# Altium PCB UZ_A_DSUB_Breakout.PcbDoc
Units mm, origin at the board's own origin, x right, y up, seen from the top; angles counter-clockwise.
Board outline 156 x 100 mm, 2 copper layers (Top Layer, Bottom Layer), stack 1.535 mm thick; 7 components, 47 nets, 132 pads, 39 vias.
Unrouted connection lines stored in the file: 1.
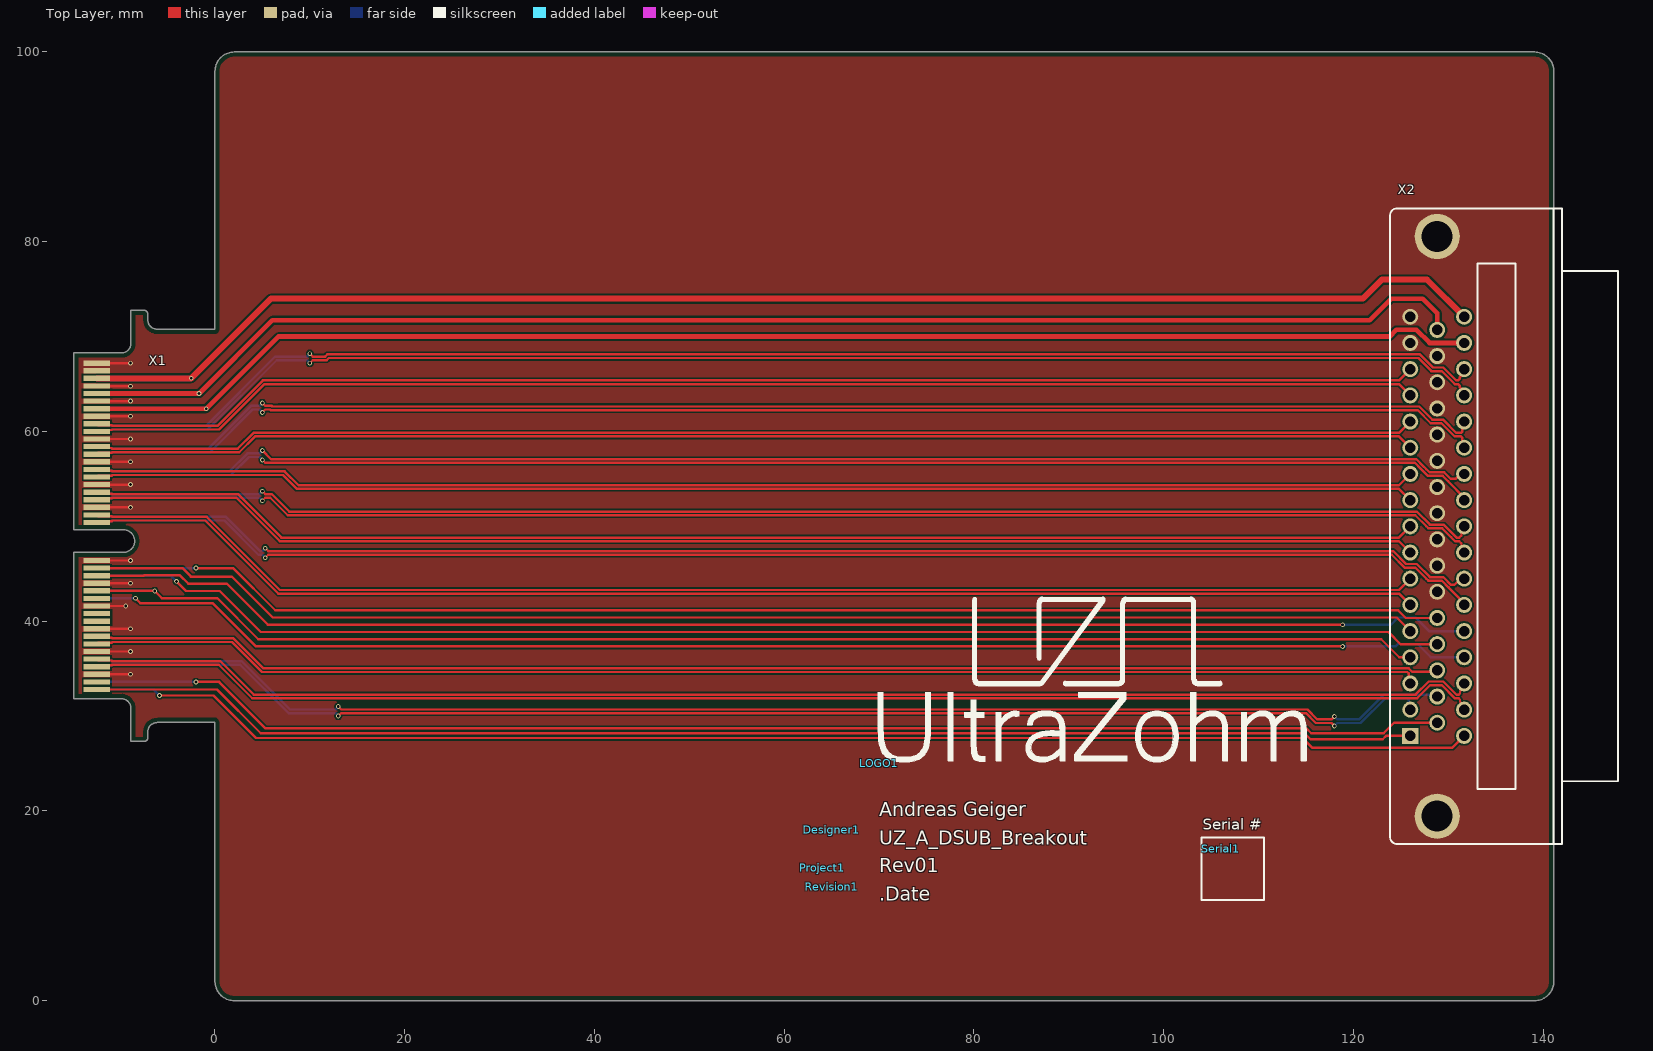
[diagram p0: Top Layer view]
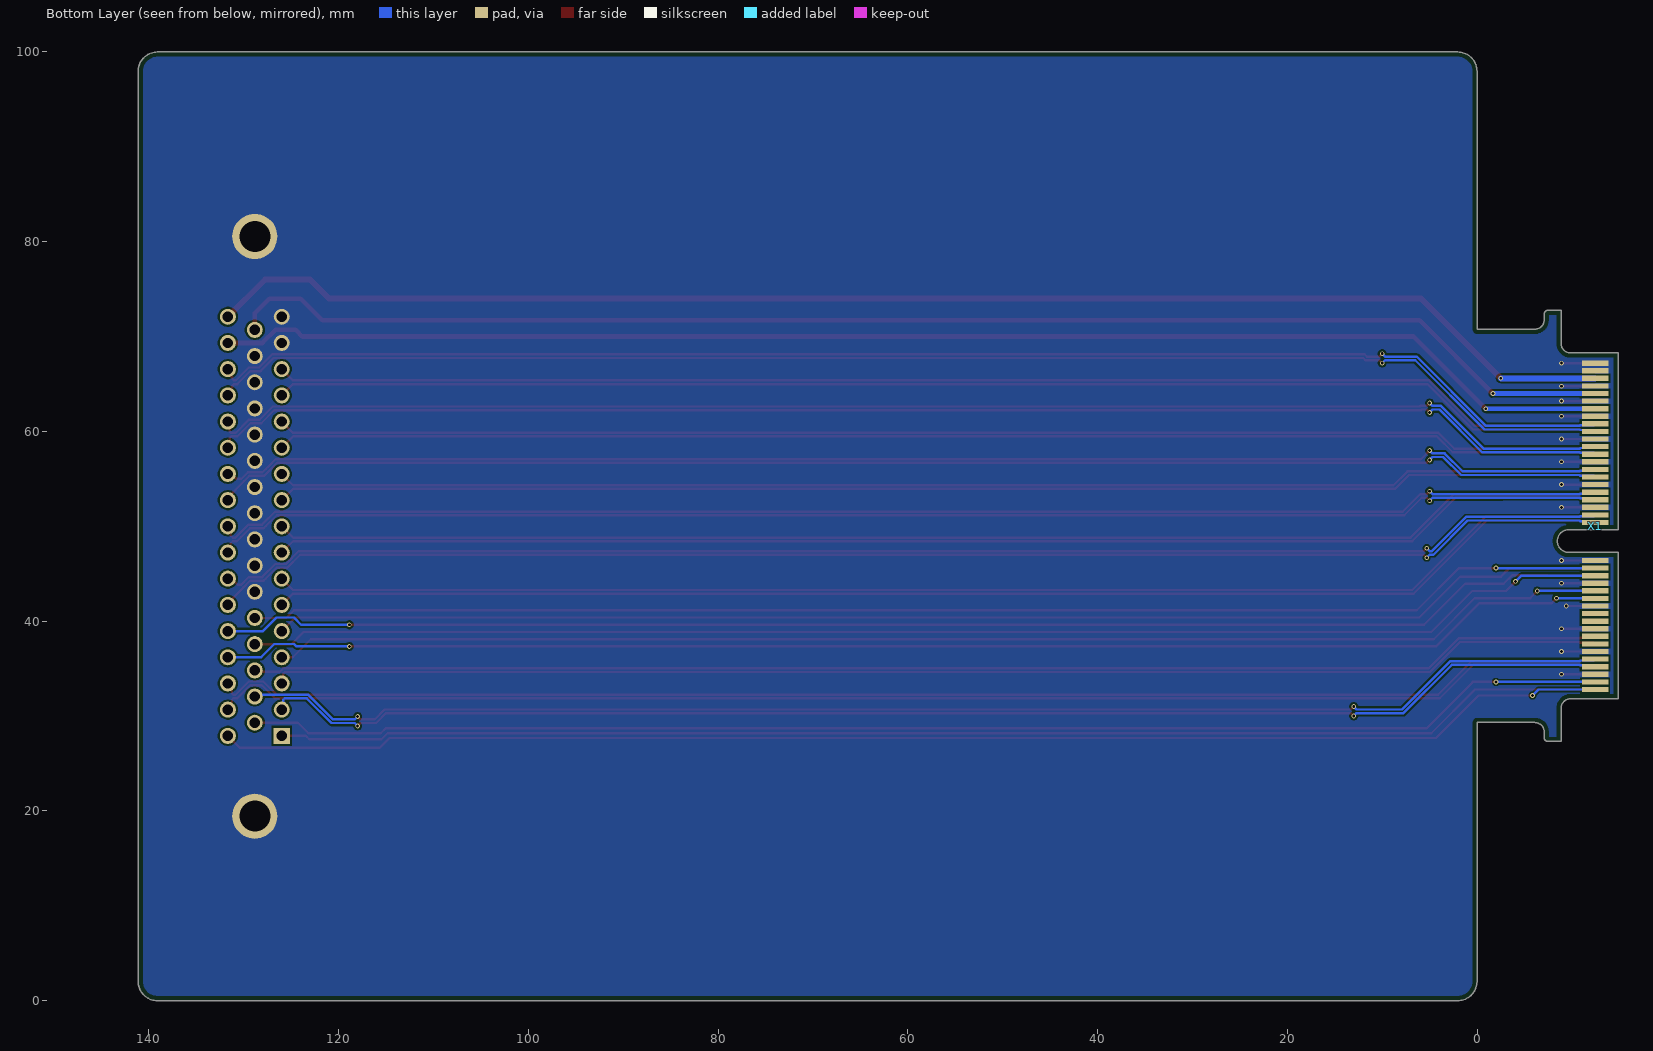
[diagram p1: Bottom Layer view, seen from below]

## Layer stack, top to bottom
Top Mask: solder mask 0.015, Solder Resist, Dk 3.8
Top Layer: signal copper 0.035
Dielectric 1: prepreg 0.2, 7628, Dk 4.6
Core: core 1.065, FR-4, Dk 4.5
Dielectric 2: prepreg 0.2, 7628, Dk 4.6
Bottom Layer: signal copper 0.035
Bottom Mask: solder mask 0.015, Solder Resist, Dk 3.8

## Board outline
-14.859,31.821 -9.859,31.821 cw(c-9.859,30.821) -8.859,30.821 -8.859,27.321 -7.479,27.321 ccw(c-7.479,27.721) -7.079,27.721 -7.079,28.321 cw(c-6.079,28.321) -6.079,29.321 0,29.321 0,2.007 ccw(c2.032,2.032) 2.057,0 139.1,0 ccw(c139.1,2.04) 141.14,2.04 141.14,97.96 ccw(c139.1,97.96) 139.1,100 2.032,100 ccw(c2.032,97.968) 0,97.968 0,70.771 -6.079,70.771 cw(c-6.079,71.771) -7.079,71.771 -7.079,72.371 ccw(c-7.479,72.371) -7.479,72.771 -8.859,72.771 -8.859,69.271 cw(c-9.859,69.271) -9.859,68.271 -14.859,68.271 -14.859,49.646 -9.659,49.646 cw(c-9.659,48.446) -9.659,47.246 -14.859,47.246

## Design rules (kind name [scope] priority, off if disabled: settings)
BoardOutlineClearance BoardOutlineClearance_TopOverlay [OnLayer('Top Overlay') or OnLayer('Bottom Overlay')] p1: gap=0 ignorepadtopadclearanceinfootprint=FALSE
BoardOutlineClearance [All] p2: gap=0.508 ignorepadtopadclearanceinfootprint=FALSE except(0: Arc-SplitContinuation Track-SplitContinuation SMDPad-SplitContinuation THPad-SplitContinuation Via-SplitContinuation Fill-SplitContinuation Poly-SplitContinuation Region-SplitContinuation Text-OutlineEdge Text-CavityEdge Text-CutoutEdge Text-SplitBarrior Text-SplitContinuation; 0.254: SMDPad-OutlineEdge SMDPad-CavityEdge SMDPad-CutoutEdge SMDPad-SplitBarrior)
Clearance [All] p1: gap=0.2 ignorepadtopadclearanceinfootprint=FALSE except(0: Arc-Text Track-Text SMDPad-Text THPad-Text Via-Text Fill-Text Poly-Text Region-Text Text-Text Text-Hole; 0.127: Arc-Arc Arc-Track Track-Track SMDPad-SMDPad; 0.254: Arc-Via Track-Via; 0.5: THPad-THPad Via-Via)
ComponentClearance [All] p1: gap=0 collisioncheckmode=3 verticalgap=0 showdistances=FALSE
DiffPairsRouting [All] p1: maxlimit=0.127 minlimit=0.127 mostfreqgap=0.127 toplayer_minwidth=0.254 toplayer_maxwidth=0.254 toplayer_prefwidth=0.254 bottomlayer_minwidth=0.254 bottomlayer_maxwidth=0.254 bottomlayer_prefwidth=0.254 impedanceprofiledriven=TRUE impedanceprofileid={1E899714-F215-421E-BD83-15DB56C979E2} impedanceprofilevalue=100.000000 maxuncoupledlength=12.7
HoleSize [All] p1: absolutevalues=TRUE maxlimit=6.3 minlimit=0.2 maxpercent=80.000 minpercent=20.000
MatchedLengths [All] p1: tolerance=0.254 checknetsindiffpair=TRUE checkdiffpairvsdiffpair=FALSE checkxsignals=FALSE checkothers=FALSE
MinimumSolderMaskSliver [All] p1: minsoldermaskwidth=0.089
PlaneConnect [All] p1: pad.planeconnectstyle=Relief pad.reliefexpansion=0.508 pad.reliefentries=4 pad.reliefconductorwidth=0.254 pad.reliefairgap=0.254 via.planeconnectstyle=Direct via.reliefexpansion=0.508 via.reliefentries=4 via.reliefconductorwidth=0.254 via.reliefairgap=0.254
PolygonConnect PolygonConnect_GND [InNet('GND')] p1 off: thpad.connectstyle=Relief thpad.reliefconductorwidth=0.254 thpad.reliefentries=4 thpad.polygonreliefangle="90 Angle" thpad.airgapwidth=0.254 smdpad.connectstyle=Relief smdpad.reliefconductorwidth=0.254 smdpad.reliefentries=4 smdpad.polygonreliefangle="90 Angle" smdpad.airgapwidth=0.254 via.connectstyle=Direct via.reliefconductorwidth=0.254 via.reliefentries=4 via.polygonreliefangle="90 Angle" via.airgapwidth=0.254
PolygonConnect [All] p2: connectstyle=Direct reliefconductorwidth=0.254 reliefentries=4 polygonreliefangle="90 Angle" airgapwidth=0.127
RoomDefinition Component_UpperEdgeKeepOut [All] p1: confinementstyle=ConfineOut formatcopy=TRUE lockcomponents=FALSE outline 0,97 142,97 142,100 0,100
RoomDefinition Component_LowerEdgeKeepOut [All] p2: confinementstyle=ConfineOut formatcopy=TRUE lockcomponents=FALSE outline 0,0 142,0 142,3 0,3
RoutingVias [All] p1: holewidth=0.3 width=0.6 viastyle="Through Hole" minholewidth=0.2 minwidth=0.4 maxholewidth=0.8 maxwidth=1.6
SilkToSilkClearance [All] p1: silktosilkclearance=0
SilkToSolderMaskClearance [IsPad] p1: minsilkscreentomaskgap=0 clearancetoexposedcopper=TRUE
SolderMaskExpansion [All] p1: expansion=0.102 istentingtop=FALSE
Width width_s75 [InNetClass('S75')] p1 off: maxlimit=0.1 minlimit=0.1 preferedwidth=0.1 minimp=50.000000 maximp=50.000000 favimp=50.000000
Width [All] p2: maxlimit=10 minlimit=0.2 preferedwidth=0.254 minimp=50.000000 maximp=50.000000 favimp=50.000000
23 further rules are at their usual default settings.

## Classes and differential pairs
net class S75: ANL_SPI_CLK ANL_SPI_CS ANL_SPI_MOSI
net class HS: GTH_CLK_N GTH_CLK_P GTH_RX0_N GTH_RX0_P GTH_TX0_N GTH_TX0_P
component class TopSheet: Designer1 LOGO1 Project1 Revision1 Serial1
component class U_CarrierConnector: X1
component class U_AnalogConnector: X2
differential pair GTH_TX0: +GTH_TX0_P -GTH_TX0_N
differential pair GTH_RX0: +GTH_RX0_P -GTH_RX0_N
differential pair GTH_CLK: +GTH_CLK_P -GTH_CLK_N
differential pair ANL_09: +ANL_09_P -ANL_09_N
differential pair ANL_08: +ANL_08_P -ANL_08_N
differential pair ANL_07: +ANL_07_P -ANL_07_N
differential pair ANL_06: +ANL_06_P -ANL_06_N
differential pair ANL_05: +ANL_05_P -ANL_05_N
differential pair ANL_04: +ANL_04_P -ANL_04_N
differential pair ANL_03: +ANL_03_P -ANL_03_N
differential pair ANL_02: +ANL_02_P -ANL_02_N
differential pair ANL_01: +ANL_01_P -ANL_01_N
differential pair ANL_00: +ANL_00_P -ANL_00_N

## Components (designator, comment, footprint, x,y, rotation, side; value= is the part's Value field where it differs from the comment)
Designer1 "Andreas Geiger" Designator:comment 65,18 r0 top
LOGO1 "UZ Logo" UZ_Logo_medium 70,25 r0 top
Project1 "UZ_A_DSUB_Breakout" COMMENT 64,14 r0 top
Revision1 "Rev01" Designator:comment 65,12 r0 top
Serial1 "Serial #" SERIAL 106,16 r0 top
X1 "HSEC8-140-01-XX-DV-A-BL-CARD" HSEC8-140-01-XX-DV-A-BL-CARD -14.846,50 r270 bottom
X2 "163A18339X" dsub50_male_163A18339X 126,27.912 r90 top locked

## Footprints (in the part's own frame and the unit in brackets; to place one, negate y for a bottom-side part, rotate by r counter-clockwise, add the part's x,y. Pads: shape width x height; smd on the part's side, far side on the other; paste and mask are expansions set on the pad)
COMMENT [mm] "prints out the comment of a component"
Designator:comment [mm] "prints out designator and comment of a component"
dsub50_male_163A18339X [mm]
  rect 1.69x1.69 hole 1.09: 1(0,0)
  round 1.69 hole 1.09: 2(2.761,0) 3(5.522,0) 4(8.283,0) 5(11.044,0) 6(13.805,0) 7(16.566,0) 8(19.327,0) 9(22.088,0) 10(24.849,0) 11(27.61,0) 12(30.371,0) 13(33.132,0) 14(35.893,0) 15(38.654,0) 16(41.415,0) 17(44.176,0) 18(1.381,-2.84) 19(4.142,-2.84) 20(6.903,-2.84) 21(9.664,-2.84) 22(12.425,-2.84) 23(15.186,-2.84) 24(17.946,-2.84) 25(20.707,-2.84) 26(23.469,-2.84) 27(26.23,-2.84) 28(28.991,-2.84) 29(31.752,-2.84) 30(34.512,-2.84) 31(37.273,-2.84) 32(40.034,-2.84) 33(42.795,-2.84) 34(0,-5.68) 35(2.761,-5.68) 36(5.522,-5.68) 37(8.283,-5.68) 38(11.044,-5.68) 39(13.805,-5.68) 40(16.566,-5.68) 41(19.327,-5.68) 42(22.088,-5.68) 43(24.849,-5.68) 44(27.61,-5.68) 45(30.371,-5.68) 46(33.132,-5.68) 47(35.893,-5.68) 48(38.654,-5.68) 49(41.415,-5.68) 50(44.176,-5.68)
  round 4.76 hole 3.26: 51(-8.467,-2.84) 52(52.643,-2.84)
  silkscreen extent -11.4,-21.9 55.6,2.12, body extent -11.42,-21.99 55.58,2.11, height 16.34
HSEC8-140-01-XX-DV-A-BL-CARD [mm]
  rect 0.55x2.8 smd far side mask+0.05: 1(-17.2,-2.4) 3(-16.4,-2.4) 5(-15.6,-2.4) 7(-14.8,-2.4) 9(-14,-2.4) 11(-13.2,-2.4) 13(-12.4,-2.4) 15(-11.6,-2.4) 17(-10.8,-2.4) 19(-10,-2.4) 21(-9.2,-2.4) 23(-8.4,-2.4) 25(-7.6,-2.4) 27(-6.8,-2.4) 29(-6,-2.4) 31(-5.2,-2.4) 33(-4.4,-2.4) 35(-3.6,-2.4) 37(-2.8,-2.4) 39(-2,-2.4) 41(-1.2,-2.4) 43(-0.4,-2.4) 45(3.6,-2.4) 47(4.4,-2.4) 49(5.2,-2.4) 51(6,-2.4) 53(6.8,-2.4) 55(7.6,-2.4) 57(8.4,-2.4) 59(9.2,-2.4) 61(10,-2.4) 63(10.8,-2.4) 65(11.6,-2.4) 67(12.4,-2.4) 69(13.2,-2.4) 71(14,-2.4) 73(14.8,-2.4) 75(15.6,-2.4) 77(16.4,-2.4) 79(17.2,-2.4)
  rect 0.55x2.8 smd mask+0.05: 2(-17.2,-2.4) 4(-16.4,-2.4) 6(-15.6,-2.4) 8(-14.8,-2.4) 10(-14,-2.4) 12(-13.2,-2.4) 14(-12.4,-2.4) 16(-11.6,-2.4) 18(-10.8,-2.4) 20(-10,-2.4) 22(-9.2,-2.4) 24(-8.4,-2.4) 26(-7.6,-2.4) 28(-6.8,-2.4) 30(-6,-2.4) 32(-5.2,-2.4) 34(-4.4,-2.4) 36(-3.6,-2.4) 38(-2.8,-2.4) 40(-2,-2.4) 42(-1.2,-2.4) 44(-0.4,-2.4) 46(3.6,-2.4) 48(4.4,-2.4) 50(5.2,-2.4) 52(6,-2.4) 54(6.8,-2.4) 56(7.6,-2.4) 58(8.4,-2.4) 60(9.2,-2.4) 62(10,-2.4) 64(10.8,-2.4) 66(11.6,-2.4) 68(12.4,-2.4) 70(13.2,-2.4) 72(14,-2.4) 74(14.8,-2.4) 76(15.6,-2.4) 78(16.4,-2.4) 80(17.2,-2.4)
SERIAL [mm]
  silkscreen extent -2,-5.4 4.6,1.2
UZ_Logo_medium [mm] "logo width 4.5cm"
  silkscreen extent -0.1,0.17 45.04,17.54

## Part data
Designer1: library part 4, "Create a project parameter named \"Author\" this is the value of this component. It is printed on the PCB. Once the parameter is updated (e.g. new revision) it gets updated on the PCB as well", Manufacturer="PCB Manufacturer", Manufacturer Part Number="Project Author", Component Type="Project Author", Created from="T. Wendt", Created On="01.03.2021 08:53:41", Last Updated="01.03.2021 09:20:27", Live Cycle Status=1, PartID=4, Type="Standard (No BOM)"
LOGO1: library part 1, "Official Project Logo of the UltraZohm", Manufacturer="PCB Manufacturer", Manufacturer Part Number="UltraZohm Logo", Component Type=Logo, ComponentLink1Description=Homepage, ComponentLink1URL=https://ultrazohm.com, Created from="T. Wendt", Created On="19.02.2021 16:55:56", Last Updated="02.03.2021 14:31:24", Live Cycle Status=1, PartID=1, Type="Standard (No BOM)"
Project1: library part 2, "Create a project parameter named \"ProjectNameCustom\" this is the value of this component and it is printed on the PCB.", Manufacturer="PCB Manufacturer", Manufacturer Part Number="Project Name", Component Type="Project Name", Created from="T. Wendt", Created On="01.03.2021 08:43:57", Last Updated="01.03.2021 09:07:27", Live Cycle Status=1, PartID=2, Type="Standard (No BOM)"
Revision1: library part 3, "Create a project parameter named \"ProjectRevision\" this is the value of this component. It is printed on the PCB. Once the parameter is updated (e.g. new revision) it gets updated on the PCB as well", Manufacturer="PCB Manufacturer", Manufacturer Part Number="Project Revision", Component Type="Project Revision", Created from="T. Wendt", Created On="01.03.2021 08:50:34", Last Updated="01.03.2021 09:28:36", Live Cycle Status=1, PartID=3, Type="Standard (No BOM)"
Serial1: library part 6, "Field to put in a serial number", Manufacturer="PCB Manufacturer", Manufacturer Part Number="Serial Number", Component Type="Serial Number", Created from="T. Wendt", Created On="02.03.2021 14:31:24", Last Updated="02.03.2021 14:31:24", Live Cycle Status=1, PartID=6, Type="Standard (No BOM)"
X1: "Mating Card Layout for HSEC8-140-01-XX-DV-A-BL-CARD", Device Package="PCB Shape", Manufacturer=SAMTEC, Supplier Part Number 1=NA, Component Type="Board to Board Connector", ComponentLink1Description=Homepage, ComponentLink1URL=https://www.samtec.com/products/hsec8-dp, Created=2018_04_23_AGeiger, Created from=MHlatky, Created On="26.02.2021 16:36:12", Last Updated="26.02.2021 16:37:20", Live Cycle Status=1, Manufacturer Part Number=HSEC8-140-01-XX-DV-A-BL-CARD, Mounting Type="PCB Shape", Number of positions=100, Number of rows=2, PartID=21, Series=HSEC8, Stock number="not stored", Supplier 1=SAMTEC, Type="Board to Board Connector"
X2: "D-Sub Standard Connectors DSUB SOLDER PIN ANG 9.4mm", Manufacturer=CONEC, Operating Temperature="-55 °C to +125 °C", Supplier Part Number 1="D-SUB ST 50GWC", ComponentLink1Description=Datasheet, ComponentLink1URL=https://conec.com/catalog/pub/media/conec/drawings/163A18339X.pdf, Created=2021_03_25_AGeiger, Created from=AGeiger, Created On="22.12.2022 17:03:01", Last Updated="22.12.2022 17:05:07", Manufacturer Part Number=163A18339X, MF=CONEC, Mounting Type=THT, MPN=163A18339X, PartID=3, Series="D-SUB Standard", Supplier 1=Reichelt, Supplier 2=Mouser, Supplier 3=Digi-Key

## Via types
v1: diameter 0.5, hole 0.3, Top Layer to Bottom Layer, 39 vias

## Nets (pads, with @x,y where several pads share a name; then routed paths per layer and width w, separated by ;. In a path a pad name is that pad's centre, name@x,y a point inside that pad or via, vN(x,y) a via of type N, cw(c..) or ccw(c..) an arc to the next point about the centre after c; other vN are vias at no path point)
3V3: X1.13 X1.14 X2.49 | length 159.7
  Top Layer w0.5: X1.13 v1(-0.922,62.4) 6.678,70 123.82,70 124.528,70.707 126.652,70.707 128.032,69.327 X2.49
  Bottom Layer w0.5: X1.14 v1(-0.922,62.4)
5V: X1.9 X1.10 X2.33 | length 158.6
  Top Layer w0.5: X1.9 v1(-1.668,64) 6.057,71.725 121.725,71.725 124,74 127.32,74 128.84,72.48 X2.33
  Bottom Layer w0.5: X1.10 v1(-1.668,64)
ANL_00_N: X1.19 X2.14 | length 141
  Top Layer w0.254: X1.19 -12.298,60.148 -10.884,60.148 -10.822,60.209 0.424,60.209 5.21,64.995 124.81,64.995 X2.14
ANL_00_P: X1.17 X2.15 | length 141
  Top Layer w0.254: X1.17 -12.298,60.652 -10.884,60.652 -10.822,60.591 0.266,60.591 5.052,65.376 124.81,65.376 X2.15
ANL_01_N: X1.20 X2.47 | length 149.5
  Top Layer w0.254: v1(10,67.2) 10.309,67.509 11.771,67.509 12,67.738 126.852,67.738 128.232,66.358 129.326,66.358 130.688,64.995 131.057,64.995 131.206,64.846 131.206,64.668 131.68,64.194 X2.47
  Bottom Layer w0.254: X1.20 -12.298,60.148 -10.884,60.148 -10.822,60.209 -0.791,60.209 6.509,67.509 9.691,67.509 v1(10,67.2)
ANL_01_P: X1.18 X2.48 | length 149.5
  Top Layer w0.254: v1(10,68.2) 10.309,67.891 11.613,67.891 11.842,68.119 127.01,68.119 128.39,66.739 129.483,66.739 130.846,65.376 131.057,65.376 131.206,65.525 131.206,65.703 131.68,66.177 X2.48
  Bottom Layer w0.254: X1.18 -12.298,60.652 -10.884,60.652 -10.822,60.591 -0.949,60.591 6.351,67.891 9.691,67.891 v1(10,68.2)
ANL_02_N: X1.25 X2.12 | length 139.7
  Top Layer w0.254: X1.25 -12.298,57.748 -10.884,57.748 -10.822,57.809 2.557,57.809 4.221,59.473 124.81,59.473 X2.12
ANL_02_P: X1.23 X2.13 | length 139.7
  Top Layer w0.254: X1.23 -12.298,58.252 -10.884,58.252 -10.822,58.191 2.399,58.191 4.063,59.854 124.81,59.854 X2.13
ANL_03_N: X1.26 X2.45 | length 148.5
  Top Layer w0.254: v1(5,62) 5.309,62.309 5.812,62.309 5.869,62.252 126.782,62.252 128.162,60.871 129.29,60.871 130.688,59.473 131.346,59.473 131.495,59.324 131.495,58.468 X2.45
  Bottom Layer w0.254: X1.26 -12.298,57.748 -10.884,57.748 -10.822,57.809 -0.53,57.809 3.97,62.309 4.691,62.309 v1(5,62)
ANL_03_P: X1.24 X2.46 | length 148.5
  Top Layer w0.254: v1(5,63) 5.309,62.691 5.97,62.691 6.027,62.633 6.616,62.633 126.94,62.633 128.32,61.252 129.448,61.252 130.846,59.854 131.346,59.854 131.495,60.003 131.495,60.859 X2.46
  Bottom Layer w0.254: X1.24 -12.298,58.252 -10.884,58.252 -10.822,58.191 -0.688,58.191 3.812,62.691 4.691,62.691 v1(5,63)
ANL_04_N: X1.31 X2.10 | length 139.6
  Top Layer w0.254: X1.31 -12.298,55.348 -10.884,55.348 -10.822,55.409 7.191,55.409 8.649,53.951 124.81,53.951 X2.10
ANL_04_P: X1.29 X2.11 | length 139.6
  Top Layer w0.254: X1.29 -12.298,55.852 -10.884,55.852 -10.822,55.791 7.349,55.791 8.807,54.332 124.81,54.332 X2.11
ANL_05_N: X1.32 X2.43 | length 147.1
  Top Layer w0.254: v1(5,57) 5.306,56.694 126.486,56.694 127.09,56.09 127.866,55.314 129.417,55.314 130,54.73 131.68,53.05 X2.43
  Bottom Layer w0.254: X1.32 -12.298,55.348 -10.884,55.348 -10.822,55.409 1.673,55.409 3.573,57.309 4.691,57.309 v1(5,57)
ANL_05_P: X1.30 X2.44 | length 146.6
  Top Layer w0.254: v1(5,58) 5.925,57.075 126.643,57.075 127.359,56.359 127.703,56.015 128.024,55.695 129.575,55.695 130.27,55 130.769,55 131.291,55.522 X2.44
  Bottom Layer w0.254: X1.30 -12.298,55.852 -10.884,55.852 -10.822,55.791 1.515,55.791 3.415,57.691 4.691,57.691 v1(5,58)
ANL_06_N: X1.37 X2.8 | length 140.9
  Top Layer w0.254: X1.37 -12.298,52.948 -10.884,52.948 -10.822,53.009 2.263,53.009 6.844,48.429 124.81,48.429 X2.8
ANL_06_P: X1.35 X2.9 | length 140.9
  Top Layer w0.254: X1.35 -12.298,53.452 -10.884,53.452 -10.822,53.391 2.421,53.391 7.002,48.81 124.81,48.81 X2.9
ANL_07_N: X1.38 X2.41 | length 147.5
  Top Layer w0.254: v1(5,52.7) 5.309,53.009 5.833,53.009 7.67,51.172 126.531,51.172 127.703,50 127.912,49.792 129.357,49.792 130.309,48.84 130.72,48.429 131.171,48.429 131.405,48.194 131.405,47.275 X2.41@131.68,47
  Bottom Layer w0.254: X1.38 -12.298,52.948 -10.884,52.948 -10.822,53.009 -2.721,53.009 4.691,53.009 v1(5,52.7)
ANL_07_P: X1.36 X2.42 | length 147.3
  Top Layer w0.254: v1(5,53.7) 5.309,53.391 5.991,53.391 7.828,51.553 126.689,51.553 128.07,50.173 129.515,50.173 130.878,48.81 131.171,48.81 131.405,49.045 131.405,49.725 X2.42
  Bottom Layer w0.254: X1.36 -12.298,53.452 -10.884,53.452 -10.822,53.391 -2.878,53.391 4.691,53.391 v1(5,53.7)
ANL_08_N: X1.43 X2.6 | length 142.2
  Top Layer w0.254: X1.43 -12.298,50.548 -10.884,50.548 -10.822,50.609 -1.028,50.609 6.674,42.907 124.81,42.907 X2.6
ANL_08_P: X1.41 X2.7 | length 142.2
  Top Layer w0.254: X1.41 -12.298,51.052 -10.884,51.052 -10.822,50.991 -0.87,50.991 6.832,43.288 124.81,43.288 X2.7
ANL_09_N: X1.44 X2.39 | length 148.3
  Top Layer w0.254: v1(5.306,46.691) 5.615,47 124.042,47 125.392,45.65 126.531,45.65 127.703,44.478 127.912,44.27 129.326,44.27 130.04,43.555 131.68,41.915 X2.39
  Bottom Layer w0.254: X1.44 -12.298,50.548 -10.884,50.548 -10.822,50.609 1,50.609 4.609,47 5,47 5.306,46.694 v1(5.306,46.691)
ANL_09_P: X1.42 X2.40 | length 147.7
  Top Layer w0.254: v1(5.306,47.691) 5.615,47.381 124.2,47.381 125.55,46.031 126.689,46.031 128.07,44.651 129.483,44.651 130.309,43.825 130.638,43.825 131.291,44.478 X2.40
  Bottom Layer w0.254: X1.42 -12.298,51.052 -10.884,51.052 -10.822,50.991 1.158,50.991 4.767,47.381 5,47.381 5.306,47.687 v1(5.306,47.691)
ANL_Res_00: X1.59
ANL_Res_01: X1.60
ANL_Res_02: X1.61
ANL_Res_03: X1.62
ANL_Res_05: X1.66
ANL_Res_07: X1.68
ANL_Res_12: X1.77
ANL_Res_14: X1.55
ANL_SPI_CLK: X1.48 X2.22 | length 143.5
  Top Layer w0.254: v1(-2,45.6) 1.898,45.6 6.35,41.148 124.714,41.148 125.526,40.336 X2.22
  Bottom Layer w0.254: X1.48 v1(-2,45.6)
ANL_SPI_CS: X1.53 X1.54 X2.4 | length 147.5
  Top Layer w0.254: X1.53 -12.436,43.19 -6.36,43.19 v1(-6.35,43.18) -5.588,42.418 0.254,42.418 4.572,38.1 14.478,38.1 118.872,38.1 122.936,38.1 124.841,36.195 X2.4
  Bottom Layer w0.254: X1.54 -12.436,43.19 -6.36,43.19 v1(-6.35,43.18)
ANL_SPI_MOSI: X1.47 X2.5 | length 141.2
  Top Layer w0.254: X1.47 -3.436,45.6 -2.54,44.704 1.778,44.704 6.096,40.386 14.478,40.386 118.872,40.386 124.57,40.386 X2.5
Collective_FLT: X1.78 X2.18 | length 144
  Top Layer w0.254: v1(-2,33.6) 0.436,33.6 5.334,28.702 115.062,28.702 115.57,28.194 123.19,28.194 124.288,29.292 X2.18
  Bottom Layer w0.254: X1.78 v1(-2,33.6)
GND: X1.1 X1.2 X1.3 X1.4 X1.7 X1.8 X1.11 X1.12 X1.15 X1.16 X1.21 X1.22 X1.27 X1.28 X1.33 X1.34 X1.39 X1.40 X1.45 X1.46 X1.51 X1.52 X1.57 X1.58 X1.63 X1.64 X1.69 X1.70 X1.75 X1.76 X2.16 X2.17 X2.23 X2.24 X2.25 X2.26 X2.27 X2.28 X2.29 X2.30 X2.31 X2.32 X2.51 X2.52 | length 49.3
  Top Layer w0.254: X1.75 v1(-8.89,34.4) ; X1.69 v1(-8.89,36.8) ; X1.63 v1(-8.89,39.2) ; X1.57 v1(-9.398,41.6) ; X1.51 v1(-8.89,44) ; X1.45 v1(-8.89,46.4) ; X1.39 v1(-8.89,52) ; X1.33 v1(-8.89,54.4) ; X1.27 v1(-8.89,56.8) ; X1.21 v1(-8.89,59.2) ; X1.15 v1(-8.89,61.6) ; X1.11 v1(-8.89,63.2) ; X1.7@-12.446,64.77 v1(-8.89,64.77) ; X1.1 v1(-8.89,67.2)
GTH_CLK_N: X1.74 X2.2 | length 143.7
  Top Layer w0.254: v1(13,30) 13.309,30.309 115,30.309 116.045,29.264 117.691,29.264 v1(118,28.955)
  Bottom Layer w0.254: X1.74 -12.298,35.348 -10.884,35.348 -10.822,35.409 2.659,35.409 7.759,30.309 12.691,30.309 v1(13,30) ; v1(118,28.955) 118.309,29.264 120.762,29.264 123.378,31.881 125.684,31.881 125.833,31.732 125.833,30.84 X2.2
GTH_CLK_P: X1.72 X2.19 | length 145.6
  Top Layer w0.254: v1(13,31) 13.309,30.691 115.158,30.691 116.203,29.646 117.691,29.646 v1(118,29.955)
  Bottom Layer w0.254: X1.72 -12.298,35.852 -10.884,35.852 -10.822,35.791 2.817,35.791 7.917,30.691 12.691,30.691 v1(13,31) ; v1(118,29.955) 118.309,29.646 120.604,29.646 123.22,32.262 128.632,32.262 X2.19
GTH_RX0_N: X1.71 X2.36 | length 147.7
  Top Layer w0.254: X1.71 -12.298,35.852 -10.884,35.852 -10.822,35.791 0.563,35.791 4.091,32.262 126.57,32.262 127.951,33.642 129.484,33.642 130.882,32.244 131.092,32.244 131.241,32.393 131.241,32.607 131.68,33.045 X2.36
GTH_RX0_P: X1.73 X2.35 | length 147.7
  Top Layer w0.254: X1.73 -12.298,35.348 -10.884,35.348 -10.822,35.409 0.405,35.409 3.933,31.881 126.728,31.881 128.109,33.261 129.326,33.261 130.724,31.863 131.092,31.863 131.241,31.714 131.241,31.5 131.68,31.062 X2.35
GTH_TX0_N: X1.67 X2.3 | length 140.9
  Top Layer w0.254: X1.67 -12.298,37.748 -10.884,37.748 -10.822,37.809 1.783,37.809 4.951,34.642 125.684,34.642 125.833,34.493 125.833,33.601 X2.3
GTH_TX0_P: X1.65 X2.20 | length 142.9
  Top Layer w0.254: X1.65 -12.298,38.252 -10.884,38.252 -10.822,38.191 1.941,38.191 5.109,35.023 125.842,35.023 126.206,34.659 128.685,34.659 X2.20
PILOT_IN: X1.79 X2.1 | length 140.8
  Top Layer w0.254: X1.79 0.22,32.8 4.826,28.194 114.852,28.194 115.487,27.559 123.094,27.559 123.447,27.912 X2.1
PILOT_OUT: X1.80 X2.34 | length 147.2
  Top Layer w0.254: v1(-5.842,32.169) -0.165,32.169 4.318,27.686 114.641,27.686 115.657,26.67 130.438,26.67 X2.34
  Bottom Layer w0.254: X1.80 -6.473,32.8 v1(-5.842,32.169)
PS_ANL_shared: X1.56 X2.37 | length 146.9
  Top Layer w0.254: v1(-8.382,42.418) -7.874,41.91 -0.254,41.91 4.318,37.338 14.478,37.338 v1(118.872,37.338)
  Bottom Layer w0.254: X1.56 -12.437,42.409 -8.391,42.409 v1(-8.382,42.418) ; v1(118.872,37.338) 124.46,37.338 124.714,37.592 126.784,37.592 128.181,36.195 X2.37
PS_I2C0_shared_SCL: X1.49 X2.38 | length 147.2
  Top Layer w0.254: X1.49 -7.501,44.8 -7.474,44.827 -3.679,44.827 -2.794,43.942 1.27,43.942 5.588,39.624 14.478,39.624 v1(118.872,39.624)
  Bottom Layer w0.254: v1(118.872,39.624) 123.952,39.624 124.714,40.386 126.554,40.386 127.984,38.956 X2.38
PS_I2C0_shared_SDA: X1.50 X2.21 | length 144.3
  Top Layer w0.254: v1(-4.064,44.196) -3.048,43.18 0.508,43.18 4.826,38.862 14.478,38.862 123.698,38.862 124.985,37.576 X2.21
  Bottom Layer w0.254: X1.50 -4.668,44.8 v1(-4.064,44.196)
VIN: X1.5 X1.6 X2.50 | length 160
  Top Layer w0.635: X1.5 v1(-2.504,65.6) 5.896,74 121,74 123,76 127.768,76 X2.50
  Bottom Layer w0.635: X1.6 v1(-2.504,65.6)

## Polygon pours and split planes (outlines as drawn)
GND on Top Layer "GND_L01_P000" (solid, remove dead copper, pour order 0): -14.859,31.821 -9.859,31.821 cw(c-9.859,30.821) -8.859,30.821 -8.859,27.321 -7.479,27.321 ccw(c-7.479,27.721) -7.079,27.721 -7.079,28.321 cw(c-6.079,28.321) -6.079,29.321 0,29.321 0,2.007 ccw(c2.032,2.032) 2.057,0 139.1,0 ccw(c139.1,2.04) 141.14,2.04 141.14,97.96 ccw(c139.1,97.96) 139.1,100 2.032,100 ccw(c2.032,97.968) 0,97.968 0,70.771 -6.079,70.771 cw(c-6.079,71.771) -7.079,71.771 -7.079,72.371 ccw(c-7.479,72.371) -7.479,72.771 -8.859,72.771 -8.859,69.271 cw(c-9.859,69.271) -9.859,68.271 -14.859,68.271 -14.859,49.646 -9.659,49.646 cw(c-9.659,48.446) -9.659,47.246 -14.859,47.246
GND on Bottom Layer "GND_L02_P001" (solid, remove dead copper, pour order 1): -14.859,31.821 -9.859,31.821 cw(c-9.859,30.821) -8.859,30.821 -8.859,27.321 -7.479,27.321 ccw(c-7.479,27.721) -7.079,27.721 -7.079,28.321 cw(c-6.079,28.321) -6.079,29.321 0,29.321 0,2.007 ccw(c2.032,2.032) 2.057,0 139.1,0 ccw(c139.1,2.04) 141.14,2.04 141.14,97.96 ccw(c139.1,97.96) 139.1,100 2.032,100 ccw(c2.032,97.968) 0,97.968 0,70.771 -6.079,70.771 cw(c-6.079,71.771) -7.079,71.771 -7.079,72.371 ccw(c-7.479,72.371) -7.479,72.771 -8.859,72.771 -8.859,69.271 cw(c-9.859,69.271) -9.859,68.271 -14.859,68.271 -14.859,49.646 -9.659,49.646 cw(c-9.659,48.446) -9.659,47.246 -14.859,47.246

## Silkscreen, mask and mechanical layers (free items; w line width, h text height)
Top Overlay:
  text ".Date" at 70,10 h2.5
Mechanical 1:
  lines w0.1: -14.859,31.821 -14.08,31.821 -9.859,31.821 cw(c-9.859,30.821) -8.859,30.821 -8.859,27.321 -7.479,27.321 ccw(c-7.479,27.721) -7.079,27.721 -7.079,28.321 cw(c-6.079,28.321) -6.079,29.321 -0.019,29.321 0,29.321 0,2.007 ccw(c2.032,2.032) 2.057,0 139.1,0 ccw(c139.1,2.04) 141.14,2.04 141.14,97.96 ccw(c139.1,97.96) 139.1,100 2.032,100 ccw(c2.032,97.968) 0,97.968 0,70.771 -6.079,70.771 cw(c-6.079,71.771) -7.079,71.771 -7.079,72.371 ccw(c-7.479,72.371) -7.479,72.771 -8.859,72.771 -8.859,69.271 cw(c-9.859,69.271) -9.859,68.271 -14.08,68.271 -14.859,68.271 -14.859,49.646 -14.08,49.646 -9.659,49.646 cw(c-9.659,48.446) -9.659,47.246 -14.08,47.246 -14.859,47.246 -14.859,31.821